# Altium PCB Manea_ThCAD_PROIECT_PCB1.PcbDoc (part 1 of 2)
Units mm, origin at the board's own origin, x right, y up, seen from the top; angles counter-clockwise.
Board outline 230 x 140.5 mm, 2 copper layers (Top Layer, Bottom Layer); 49 components, 35 nets, 143 pads, 52 vias.
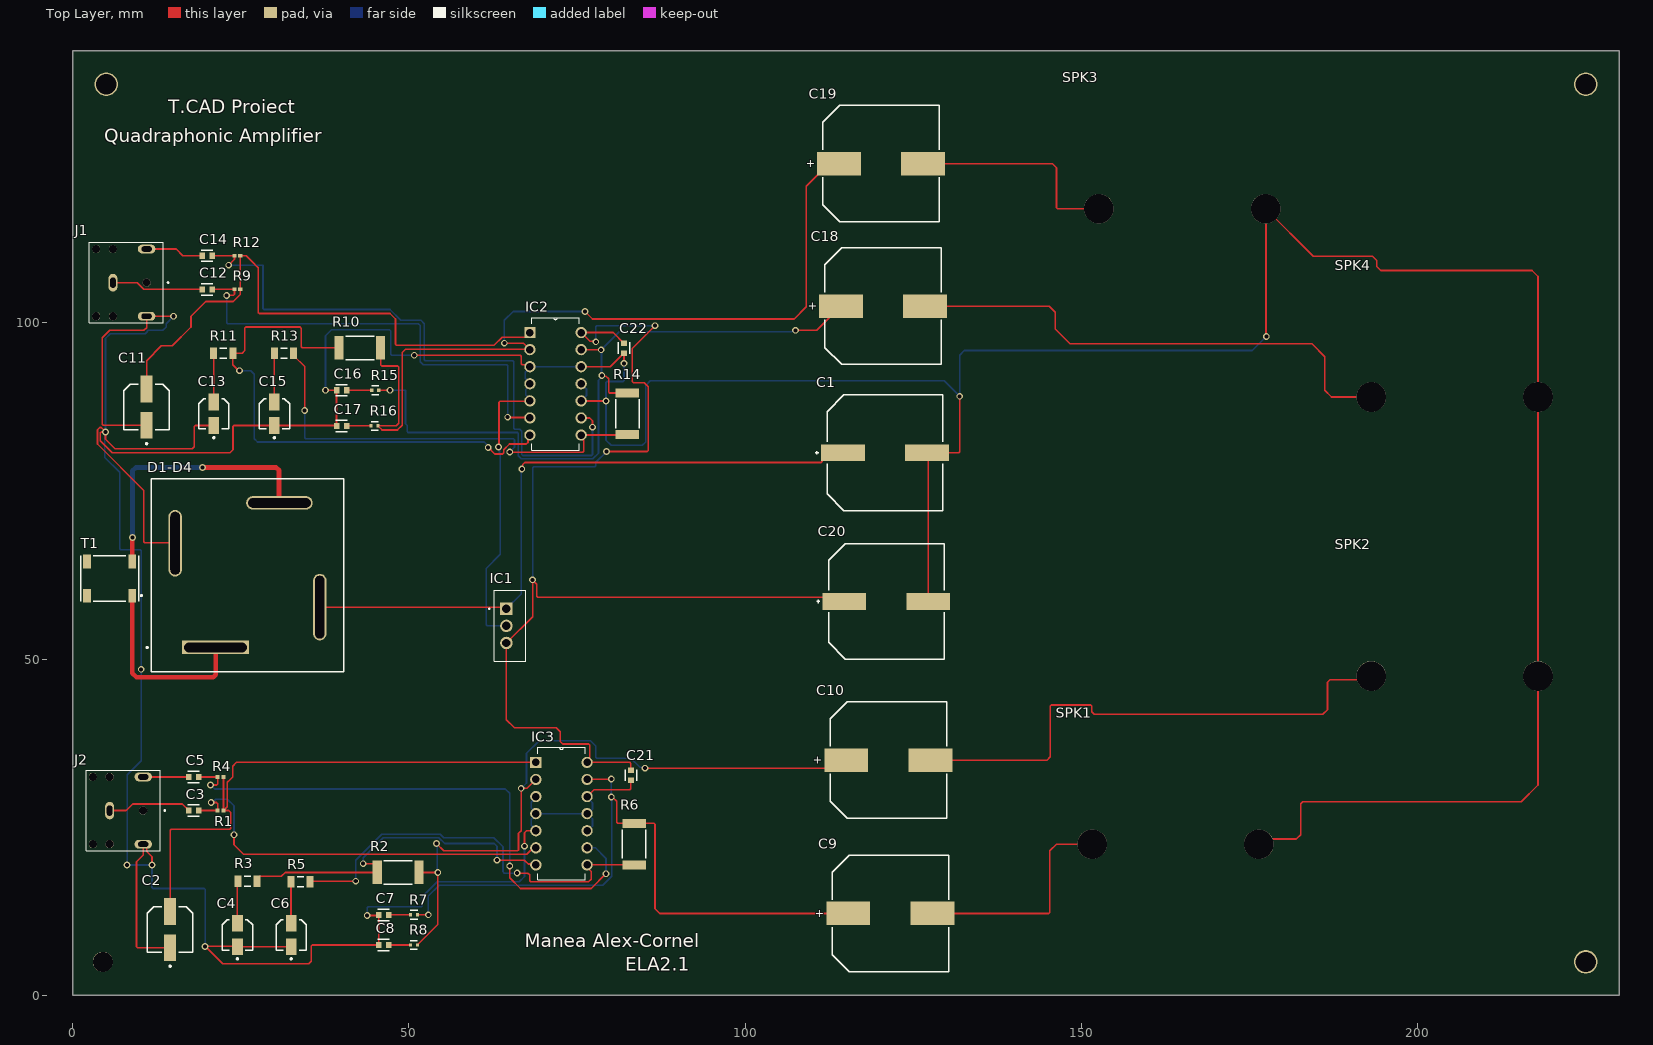
[diagram p0: Top Layer view]
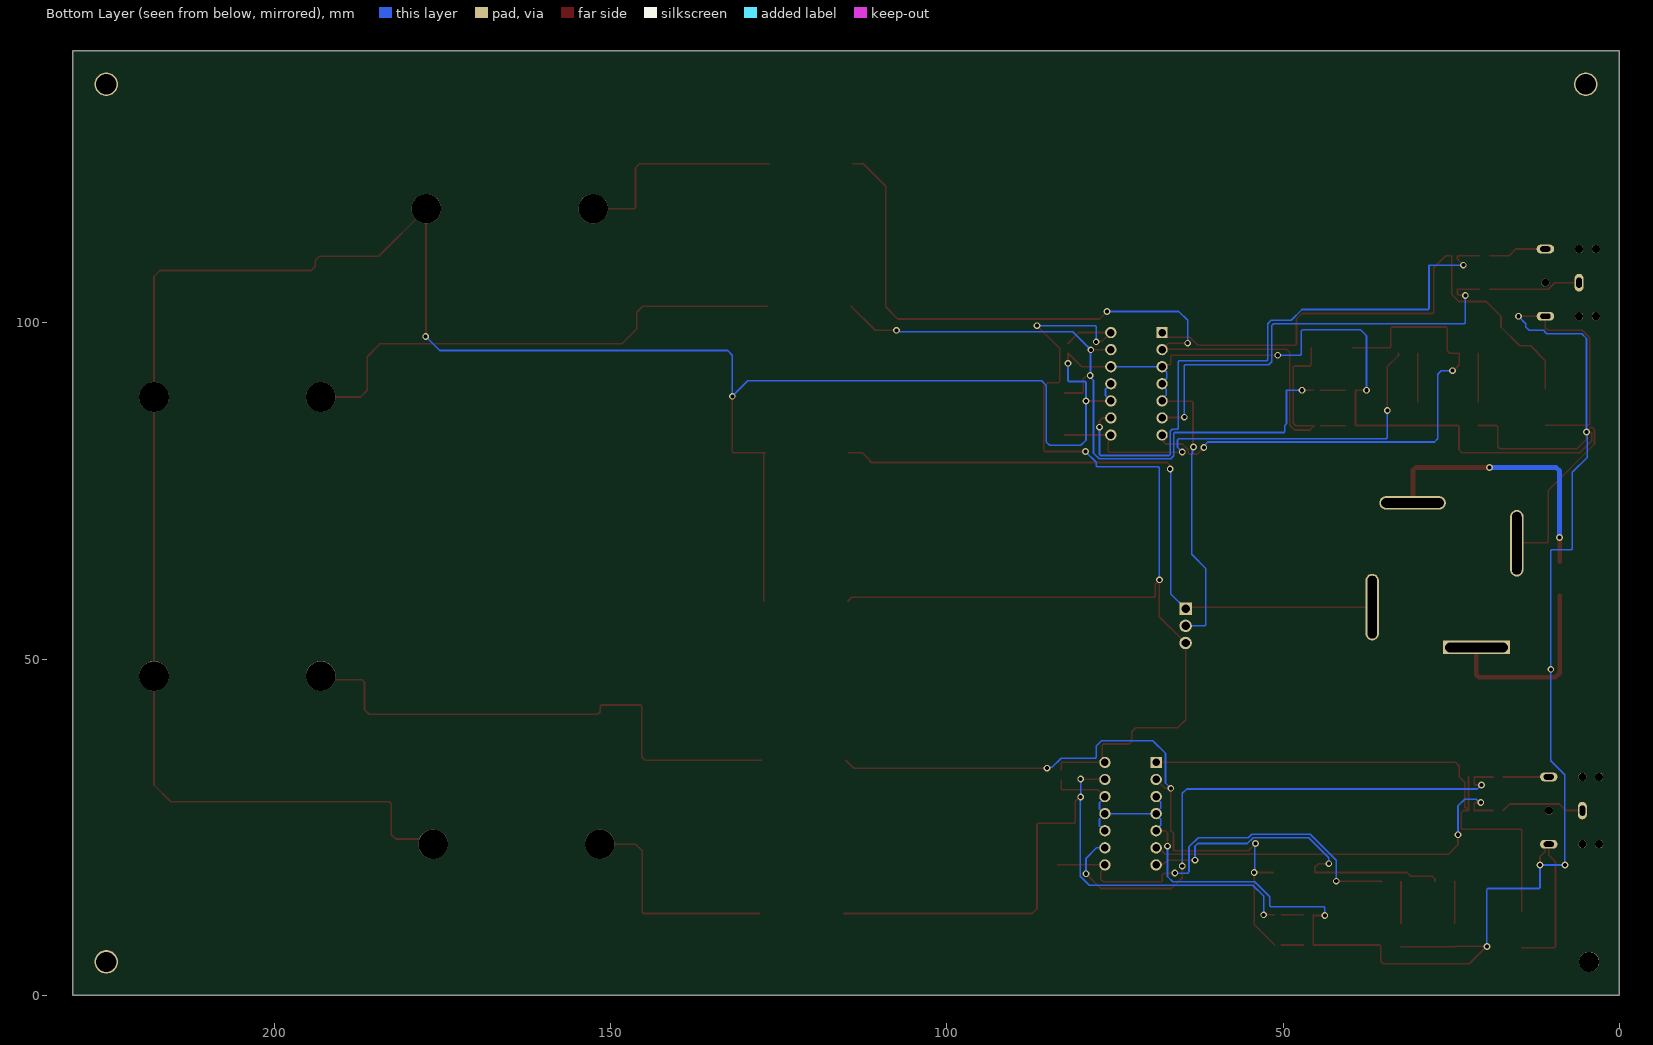
[diagram p1: Bottom Layer view, seen from below]
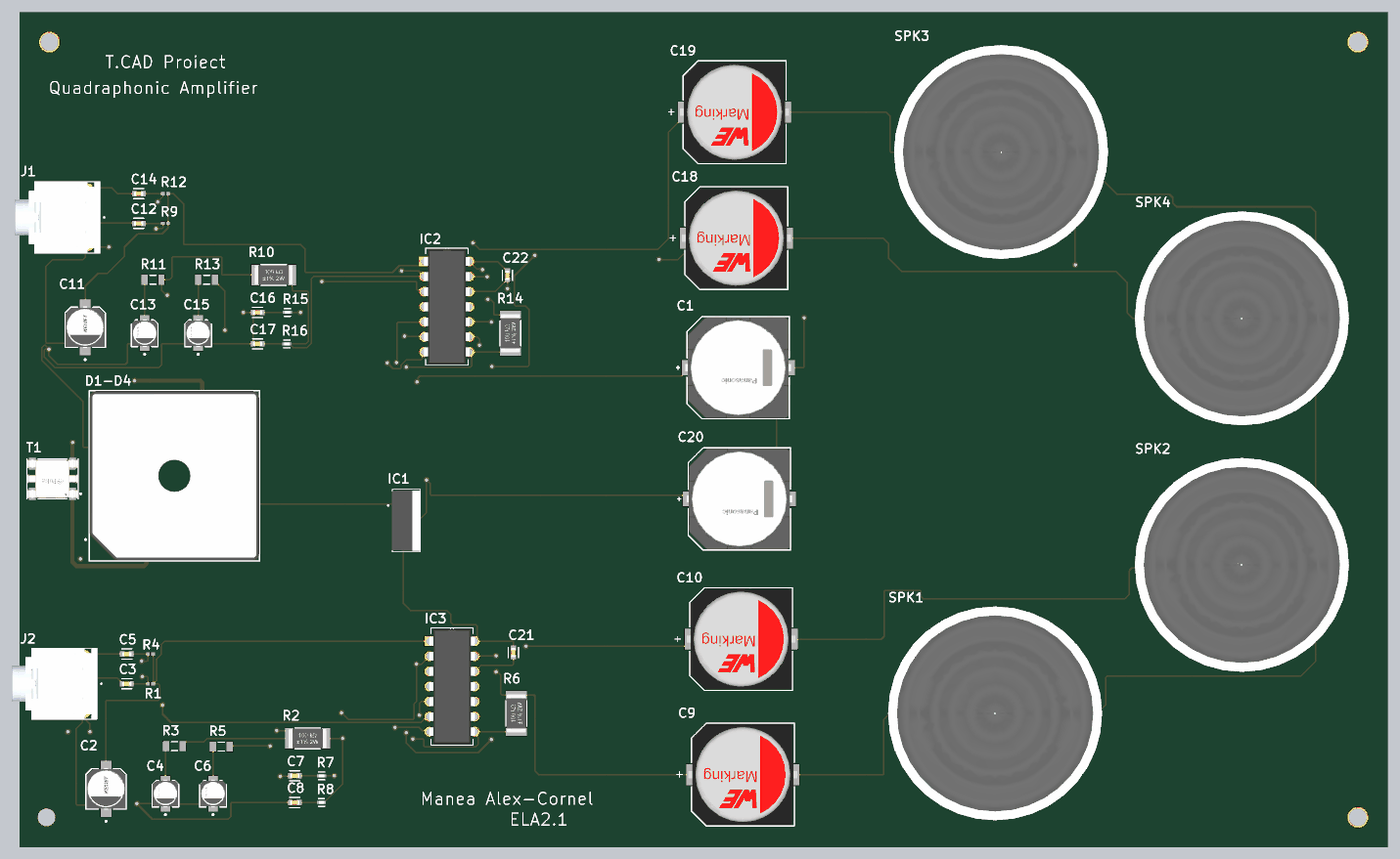
[diagram p2: 3D render of the assembled board from above, using the file's embedded part models]

## Layer stack, top to bottom
Top Solder: solder mask 0.0102, Solder Resist, Dk 3.5
Top Layer: signal copper 0.0356
Dielectric 1: dielectric 0.32, FR-4, Dk 4.8
Bottom Layer: signal copper 0.0356
Bottom Solder: solder mask 0.0102, Solder Resist, Dk 3.5

## Board outline
0,140.5 230,140.5 230,0 0,0

## Design rules (kind name [scope] priority, off if disabled: settings)
AssemblyTestPointUsage [All] p1: isadvanced=TRUE
AssemblyTestpoint [All] p1: isadvanced=TRUE testpointundercomponent=TRUE minsize=1.016 maxsize=2.54 preferedsize=1.524 minholesize=0 maxholesize=1.016 preferedholesize=0.813 testpointgrid=0.025 usegrid=TRUE gridtolerance=0 allowsidetop=TRUE allowsidebottom=TRUE
Clearance Clearance_1 [OnMid vs OnMid] p1: gap=0.25 ignorepadtopadclearanceinfootprint=FALSE sourcerule=41 cellrowname=All cellrowtype=0 cellcolname=All cellcoltype=0 innerlayers=TRUE
Clearance Clearance_2 [(ExistsOnLayer('Top Layer') Or ExistsOnLayer('Bottom Layer')) vs (ExistsOnLayer('Top Layer') Or ExistsOnLayer('Bottom Layer'))] p2: gap=0.25 ignorepadtopadclearanceinfootprint=FALSE sourcerule=41 cellrowname=All cellrowtype=0 cellcolname=All cellcoltype=0 outerlayers=TRUE
Clearance [All] p3: gap=0.254 ignorepadtopadclearanceinfootprint=FALSE ismatrix=TRUE
ComponentClearance [All] p1: isadvanced=TRUE gap=0.254 collisioncheckmode=3 verticalgap=0.254 showdistances=FALSE
FabricationTestPointUsage [All] p1: isadvanced=TRUE valid=0 allowmultiple=FALSE
FabricationTestpoint [All] p1: isadvanced=TRUE side=3 testpointundercomponent=TRUE minsize=1.016 maxsize=2.54 preferedsize=1.524 minholesize=0 maxholesize=1.016 preferedholesize=0.813 testpointgrid=0.025 allowsidetop=TRUE allowsidebottom=TRUE usegrid=TRUE gridtolerance=0
FanoutControl Fanout_BGA [IsBGA] p1: isadvanced=TRUE bgadir=Out bgaviamode=Centered fanoutstyle=Auto fanoutdirection=Alternating viagrid=0.025 // Fanout_BGA (Default Rule)
FanoutControl Fanout_LCC [IsLCC] p2: isadvanced=TRUE bgadir=Out bgaviamode=Centered fanoutstyle=Auto fanoutdirection=Alternating viagrid=0.025 // Fanout_LCC (Default Rule)
FanoutControl Fanout_SOIC [IsSOIC] p3: isadvanced=TRUE bgadir=Out bgaviamode=Centered fanoutstyle=Auto fanoutdirection=Alternating viagrid=0.025 // Fanout_SOIC (Default Rule)
FanoutControl Fanout_Small [(CompPinCount < 5)] p4: isadvanced=TRUE bgadir=Out bgaviamode=Centered fanoutstyle=Auto fanoutdirection=OutThenIn viagrid=0.025 // Fanout_Small (Default Rule)
FanoutControl Fanout_Default [All] p5: isadvanced=TRUE bgadir=Out bgaviamode=Centered fanoutstyle=Auto fanoutdirection=Alternating viagrid=0.025 // Fanout_Default (Default Rule)
Height [All] p1: isadvanced=TRUE minheight=0 maxheight=25.4 prefheight=12.7
HoleSize [All] p1: isadvanced=TRUE absolutevalues=TRUE maxlimit=2.54 minlimit=0.025 maxpercent=80.000 minpercent=20.000
HoleToHoleClearance [All] p1: isadvanced=TRUE gap=0.254 allowstackedmicrovias=TRUE
LayerPairs [All] p1: isadvanced=TRUE enforce=TRUE
MinimumSolderMaskSliver [All] p1: isadvanced=TRUE minsoldermaskwidth=0.254
NetAntennae [All] p1: isadvanced=TRUE netantennaetolerance=0
PasteMaskExpansion [All] p1: isadvanced=TRUE expansion=0
PlaneClearance [All] p1: isadvanced=TRUE clearance=0.508
PlaneConnect [All] p1: isadvanced=TRUE planeconnectstyle=Relief reliefexpansion=0.508 reliefentries=4 reliefconductorwidth=0.254 reliefairgap=0.254
PolygonConnect [All] p1: connectstyle=Relief reliefconductorwidth=0.254 reliefentries=4 polygonreliefangle="90 Angle" airgapwidth=0.254
RoutingCorners [All] p1: isadvanced=TRUE cornerstyle=45-Degree minsetback=2.54 maxsetback=2.54
RoutingPriority [All] p1: isadvanced=TRUE routingpriority=0
RoutingVias [All] p1: holewidth=0.6 width=1 viastyle="Through Hole" minholewidth=0.6 minwidth=1 maxholewidth=0.6 maxwidth=1
ShortCircuit [All] p1: isadvanced=TRUE allowed=FALSE
SilkToSilkClearance [All] p1: isadvanced=TRUE silktosilkclearance=0.254
SilkToSolderMaskClearance [IsPad] p1: isadvanced=TRUE minsilkscreentomaskgap=0.254 clearancetoexposedcopper=TRUE
SolderMaskExpansion [All] p1: isadvanced=TRUE expansion=0.102 istentingtop=FALSE
SupplyNets "Schematic Supply Nets" [InNet('GND')] p1: isadvanced=TRUE voltage=0.000
UnRoutedNet [All] p1: isadvanced=TRUE
UnpouredPolygon [All] p1: isadvanced=TRUE
Width MaxMinWidth_3 [InNet('12V 1A 1')] p1: maxlimit=1.5 minlimit=0.7 preferedwidth=0.8 minimp=50.000000 maximp=50.000000 favimp=50.000000
Width MaxMinWidth_4 [InNet('12V 1A 2')] p2: maxlimit=1.5 minlimit=0.7 preferedwidth=0.8 minimp=50.000000 maximp=50.000000 favimp=50.000000
Width MaxMinWidth_1 [InNetClass('NewClass')] p3: maxlimit=0.5 minlimit=0.2 preferedwidth=0.5 minimp=50.000000 maximp=50.000000 favimp=50.000000
Width MaxMinWidth_2 [InxNetClass('All xNets')] p4: maxlimit=0.25 minlimit=0.2 preferedwidth=0.25 minimp=50.000000 maximp=50.000000 favimp=50.000000
Width [All] p5: maxlimit=0.254 minlimit=0.254 preferedwidth=0.254
4 further rules are at their usual default settings.

## Components (designator, comment, footprint, x,y, rotation, side; value= is the part's Value field where it differs from the comment)
C1 "EEV-FK1H102M" FP-FK-J16-MFG 120.8,80.7 r180 top value=1mF
C2 "EDH476M050S9HAA" FP-EDH476M050S9HAA-IPC_A 14.5,9.8 r90 top value=47µF
C3 "Cap 100nF" FP-CC0603-DA-MFG 18,27.5 r0 top value=100nF
C4 "EEEFP1C100AR" FP-FPB-MFG 24.5,9 r90 top value=10µF
C5 "Cap 100nF" FP-CC0603-DA-MFG 18,32.5 r0 top value=100nF
C6 "EEEFP1C100AR" FP-FPB-MFG 32.5,9 r90 top value=10µF
C7 "Cap 100nF" FP-CC0603-DA-MFG 46.25,12 r180 top value=100nF
C8 "Cap 100nF" FP-CC0603-DA-MFG 46.25,7.5 r180 top value=100nF
C9 "865080463017" WCAP-ASLI_D16H17 121.6,12.2 r180 top value=2.2mF
C10 "865080463017" WCAP-ASLI_D16H17 121.3,35 r180 top value=2.2mF
C11 "EDH476M050S9HAA" FP-EDH476M050S9HAA-IPC_A 11,87.5 r90 top value=47µF
C12 "Cap 100nF" FP-CC0603-DA-MFG 20,105 r0 top value=100nF
C13 "EEEFP1C100AR" FP-FPB-MFG 21,86.5 r90 top value=10µF
C14 "Cap 100nF" FP-CC0603-DA-MFG 20,110 r0 top value=100nF
C15 "EEEFP1C100AR" FP-FPB-MFG 30,86.5 r90 top value=10µF
C16 "Cap 100nF" FP-CC0603-DA-MFG 40,90 r180 top value=100nF
C17 "Cap 100nF" FP-CC0603-DA-MFG 40,84.7 r180 top value=100nF
C18 "865080463017" WCAP-ASLI_D16H17 120.5,102.5 r180 top value=2.2mF
C19 "865080463017" WCAP-ASLI_D16H17 120.2,123.7 r180 top value=2.2mF
C20 "EEV-FK1H102M" FP-FK-J16-MFG 121,58.6 r180 top value=1mF
C21 "Cap 100nF" FP-CC0603-DA-MFG 83,32.75 r90 top value=100nF
C22 "Cap 100nF" FP-CC0603-DA-MFG 82,96.25 r90 top value=100nF
D1-D4 "VS-36MB160A" FP-95326-MFG 26,62.5 r180 top
IC1 "LM7812" TO254P1054X470X1955-3 64.5,54.96 r270 top
IC2 "LM1877N" DIP254P762X533-14 75.62,83.34 r0 top
IC3 "LM1877N" DIP254P762X533-14 76.5,19.42 r0 top
J1 "SJ1-3523N" CUI_SJ1-3523N 6,106 r270 top
J2 "SJ1-3523N" CUI_SJ1-3523N 5.5,27.5 r270 top
R1 "RC0402FR-071ML" RESC1005X40X25NL05T10 22,27.5 r0 top value=1MΩ
R2 "CRGP2512F100K" FP-CRGP2512-IPC_A 48.4,18.3 r0 top value=100kΩ
R3 "RC1206FR-071KL" RESC3116X65X40NL10T20 26,17 r0 top value=1kΩ
R4 "RC0402FR-071ML" RESC1005X40X25NL05T10 22,32.5 r0 top value=1MΩ
R5 "RC1206FR-071KL" RESC3116X65X40NL10T20 33.9,16.9 r0 top value=1kΩ
R6 "CRGP2512F100K" FP-CRGP2512-IPC_A 83.5,22.5 r90 top value=100kΩ
R7 "CR0402-J/-2R7GLF" FP-CR0402-MFG 50.762,12 r180 top value=2.7Ω
R8 "CR0402-J/-2R7GLF" FP-CR0402-MFG 50.75,7.5 r180 top value=2.7Ω
R9 "RC0402FR-071ML" RESC1005X40X25NL05T10 24.5,105 r0 top value=1MΩ
R10 "CRGP2512F100K" FP-CRGP2512-IPC_A 42.7,96.3 r0 top value=100kΩ
R11 "RC1206FR-071KL" RESC3116X65X40NL10T20 22.4,95.5 r0 top value=1kΩ
R12 "RC0402FR-071ML" RESC1005X40X25NL05T10 24.5,110 r0 top value=1MΩ
R13 "RC1206FR-071KL" RESC3116X65X40NL10T20 31.425,95.5 r0 top value=1kΩ
R14 "CRGP2512F100K" FP-CRGP2512-IPC_A 82.5,86.5 r90 top value=100kΩ
R15 "CR0402-J/-2R7GLF" FP-CR0402-MFG 45,90 r180 top value=2.7Ω
R16 "CR0402-J/-2R7GLF" FP-CR0402-MFG 44.9,84.7 r180 top value=2.7Ω
SPK1 "ASE02808MR-LW150-R" MANEA_SPEAKER 164,22.5 r0 top
SPK2 "ASE02808MR-LW150-R" MANEA_SPEAKER 205.5,47.5 r0 top
SPK3 "ASE02808MR-LW150-R" MANEA_SPEAKER 165,117 r0 top
SPK4 "ASE02808MR-LW150-R" MANEA_SPEAKER 205.5,89 r0 top
T1 "PE-68386NL" FP-PE-68386NL-MFG 5.5,62 r180 top value=785µH

## Footprints (in the part's own frame and the unit in brackets; to place one, negate y for a bottom-side part, rotate by r counter-clockwise, add the part's x,y. Pads: shape width x height; smd on the part's side, far side on the other; paste and mask are expansions set on the pad)
CUI_SJ1-3523N [mm] "Manea - Stereo jack"
  oval 2.616x1.308 hole 0.8 slot 1.5 at 0 deg: 1(0,0)
  oval 1.308x2.616 hole 0.8 slot 1.5 at 90 deg: 2(5,5) 3(-5,5)
  round 1.2 hole 1.2 unplated: ""(-5,0) ""(-5,-2.5) ""(0,5) ""(5,-2.5) ""(5,0)
  silkscreen extent -6,-3.5 6,8.3, body extent -6,-6.81 6,7.49, height 3.01
DIP254P762X533-14 [mil] "Manea - IC LM1877N"
  rect 66x66 / inner round 66 / far side rect 66x66 hole 44: 1(-300,600)
  round 66 hole 44: 2(-300,500) 3(-300,400) 4(-300,300) 5(-300,200) 6(-300,100) 7(-300,0) 8(0,0) 9(0,100) 10(0,200) 11(0,300) 12(0,400) 13(0,500) 14(0,600)
  silkscreen extent -290,-88 -10,688, body extent -305,-80 5,680, height 200
FP-95326-MFG [mm] "Manea - Bridge Diode"
  rect 9.9x2 hole 1.4 slot 9.3 at 0 deg paste-2539.97 mask+0: 1(4.75,10.75)
  rrect100% 2x9.9 hole 1.4 slot 9.3 at 90 deg paste-2539.97 mask+0: 2(-10.75,4.75) 3(10.75,-4.75)
  rrect100% 9.9x2 hole 1.4 slot 9.3 at 0 deg paste-2539.97 mask+0: 4(-4.75,-10.75)
  silkscreen extent -14.33,-14.33 15.05,14.33, body extent -14.42,-14.43 14.43,14.43, height 0.25
FP-CC0603-DA-MFG [mm] "Manea - Cap 100nF Ceramic"
  rect 0.8x0.9 smd paste+0 mask+0.102: 1(-0.75,0) 2(0.75,0)
  silkscreen extent -0.85,-0.85 0.85,0.85, body extent -1.35,-0.75 1.35,0.75, height 0.25
FP-CR0402-MFG [mm] "Manea Resis - 2.7Ω (mid - short)"
  rect 0.475x0.5 smd paste+0 mask+0: 1(-0.513,0) 2(0.512,0)
  silkscreen extent -0.53,-0.65 0.52,0.65, body extent -0.85,-0.38 0.85,0.38, height 0.25
FP-CRGP2512-IPC_A [mm] "Manea Resis - 100kΩ (long)"
  rect 1.35x3.5 smd paste+0 mask+0.102: 1(-3.102,0) 2(3.102,0)
  silkscreen extent -2.12,-1.75 2.12,1.75, body extent -4.28,-2.25 4.28,2.25, height 0.25
FP-EDH476M050S9HAA-IPC_A [mm] "Manea Cap - 47μF (small)"
  rect 4x1.8 smd paste+0 mask+0.102: 1(-2.7,0) 2(2.7,0)
  silkscreen extent -5.57,-3.4 3.4,3.4, body extent -5.7,-4.4 5.7,4.4, height 0.25
FP-FK-J16-MFG [mm] "Manea Cap - 1mF"
  rect 6.5x2.5 smd paste+0 mask+0.102: 1(-6.25,0) 2(6.25,0)
  silkscreen extent -8.6,-8.6 10.38,8.6, body extent -9.75,-8.85 9.75,8.85, height 0.25
FP-FPB-MFG [mm] "Manea Cap - 10μF"
  rect 2.5x1.6 smd paste+0 mask+0.102: 1(-1.75,0) 2(1.75,0)
  silkscreen extent -3.67,-2.25 2.25,2.25, body extent -3.25,-2.5 3.25,2.5, height 0.25
FP-PE-68386NL-MFG [mil] "Manea Transformator"
  rect 45x80 smd paste+0 mask+0: 1(-132.5,100) 3(-132.5,-100) 4(132.5,-100) 6(132.5,100)
  silkscreen extent -192,-133 170,133, body extent -174,-144 174,144, height 10
MANEA_SPEAKER [mm] "36 mm, Round Frame, 2.0 W, 8 Ohm, Neodymium Magnet, Paper Cone, Speaker [CLS0361 - Same Sky]"
  round 4.4 hole 4.4 unplated paste-2539.97 mask+0: 1(12.4,0) 2(-12.4,0)
  body extent -18,-18 18,18, height 6
RESC1005X40X25NL05T10 [mm] "Manea - Resistor 1MΩ (mid) Chip Resistor, 2-Leads, Body 1.00x0.50mm, IPC Medium Density"
  rect 0.6x0.55 smd: 1(-0.425,0) 2(0.425,0)
  body extent -0.53,-0.27 0.53,0.28, height 0.4
RESC3116X65X40NL10T20 [mm] "Manea - Resistor 1kΩ (mid) Chip Resistor, 2-Leads, Body 3.10x1.60mm, IPC Medium Density"
  rect 1.05x1.7 smd: 1(-1.425,0) 2(1.425,0)
  silkscreen extent -0.5,-0.75 0.5,0.75, body extent -1.6,-0.85 1.6,0.85, height 0.65
TO254P1054X470X1955-3 [mm] "Manea - Integrated Circuit (LM7812) [ IC1 ]"
  rect 1.86x1.86 / inner round 1.86 / far side rect 1.86x1.86 hole 1.24: 1(-2.54,0)
  round 1.86 hole 1.24: 2(0,0) 3(2.54,0)
  silkscreen extent -5.27,-2.64 5.27,2.86, body extent -5.08,-1.91 5.08,2.79, height 15.49
WCAP-ASLI_D16H17 [mm] "Manea Cap - 2.2mF Aluminium Electrolytic V-Chip SMT Capacitors, 16x17mm"
  rect 6.5x3.5 smd: 1(6.25,0) 2(-6.25,0)
  silkscreen extent -8.65,-8.65 8.65,8.65, body extent -9.15,-8.5 9.15,8.5, height 17

## Part data
C1 C20: "Radial Can - SMD ALUMINUM ELECTROLYTIC CAPACITOR FK 50V 1000muF 卤20% 0.630Dia 16.00mm", Case/Package=Radial, Dielectric Material=Aluminium, ESR (Equivalent Series Resistance)=73mΩ, Leakage Current=500µA, Manufacturer=Panasonic, Manufacturer Lifecycle Status=ACTIVE, Max Operating Temperature=105°C, Min Operating Temperature=-55°C, Ripple Current=1.61A, Supplier Part Number=PCE3477CT-ND, Tolerance=20%, Voltage=50V, Category="Aluminum Electrolytic Capacitors", ComponentLink1Description=https://datasheet.octopart.com:443/EEV-FK1H102M-Panasonic-datasheet-138897395.pdf?src-supplier=Upverter, ComponentLink1URL=https://datasheet.octopart.com:443/EEV-FK1H102M-Panasonic-datasheet-138897395.pdf?src-supplier=Upverter, ComponentLink2Description=https://datasheet.octopart.com:443/EEV-FK1H102M-Panasonic-datasheet-62287436.pdf?src-supplier=Panasonic, ComponentLink2URL=https://datasheet.octopart.com:443/EEV-FK1H102M-Panasonic-datasheet-62287436.pdf?src-supplier=Panasonic, ComponentLink3Description=https://datasheet.octopart.com:443/EEV-FK1H102M-Panasonic-datasheet-13266987.pdf?src-supplier=Newark, ComponentLink3URL=https://datasheet.octopart.com:443/EEV-FK1H102M-Panasonic-datasheet-13266987.pdf?src-supplier=Newark, ComponentLink4Description=https://datasheet.octopart.com:443/EEV-FK1H102M-Panasonic-datasheet-61627622.pdf?src-supplier=Newark, ComponentLink4URL=https://datasheet.octopart.com:443/EEV-FK1H102M-Panasonic-datasheet-61627622.pdf?src-supplier=Newark, ComponentLink5Description=https://datasheet.octopart.com:443/EEV-FK1H102M-Panasonic-datasheet-8854493.pdf?src-supplier=Farnell, ComponentLink5URL=https://datasheet.octopart.com:443/EEV-FK1H102M-Panasonic-datasheet-8854493.pdf?src-supplier=Farnell, ComponentLink6Description=https://datasheet.octopart.com:443/EEV-FK1H102M-Panasonic-datasheet-8711795.pdf?src-supplier=Farnell, ComponentLink6URL=https://datasheet.octopart.com:443/EEV-FK1H102M-Panasonic-datasheet-8711795.pdf?src-supplier=Farnell, ComponentLink7Description=https://datasheet.octopart.com:443/EEV-FK1H102M-Panasonic-datasheet-5313801.pdf?src-supplier=Farnell, ComponentLink7URL=https://datasheet.octopart.com:443/EEV-FK1H102M-Panasonic-datasheet-5313801.pdf?src-supplier=Farnell, ComponentLink8Description=https://datasheet.octopart.com:443/EEVFK1H102M-Panasonic-datasheet-7555708.pdf?src-supplier=Farnell, ComponentLink8URL=https://datasheet.octopart.com:443/EEVFK1H102M-Panasonic-datasheet-7555708.pdf?src-supplier=Farnell, ComponentLink9Description=https://datasheet.octopart.com:443/EEVFK1H102M-Panasonic-datasheet-5318435.pdf?src-supplier=Farnell, ComponentLink9URL=https://datasheet.octopart.com:443/EEVFK1H102M-Panasonic-datasheet-5318435.pdf?src-supplier=Farnell, ComponentLink10Description=https://datasheet.octopart.com:443/EEVFK1H102M-Panasonic-datasheet-5316599.pdf?src-supplier=Farnell, ComponentLink10URL=https://datasheet.octopart.com:443/EEVFK1H102M-Panasonic-datasheet-5316599.pdf?src-supplier=Farnell, ComponentLink11Description=https://datasheet.octopart.com:443/EEVFK1H102M-Panasonic-datasheet-5390910.pdf?src-supplier=Farnell, ComponentLink11URL=https://datasheet.octopart.com:443/EEVFK1H102M-Panasonic-datasheet-5390910.pdf?src-supplier=Farnell, ComponentLink12Description=https://datasheet.octopart.com:443/EEVFK1H102M-Panasonic-datasheet-7550061.pdf?src-supplier=Farnell, ComponentLink12URL=https://datasheet.octopart.com:443/EEVFK1H102M-Panasonic-datasheet-7550061.pdf?src-supplier=Farnell, ComponentLink13Description=https://datasheet.octopart.com:443/EEVFK1H102M-Panasonic-datasheet-1770.pdf?src-supplier=Farnell, ComponentLink13URL=https://datasheet.octopart.com:443/EEVFK1H102M-Panasonic-datasheet-1770.pdf?src-supplier=Farnell, ComponentLink14Description=https://datasheet.octopart.com:443/EEVFK1H102M-Panasonic-datasheet-1290.pdf?src-supplier=Farnell, ComponentLink14URL=https://datasheet.octopart.com:443/EEVFK1H102M-Panasonic-datasheet-1290.pdf?src-supplier=Farnell, ComponentLink15Description=https://datasheet.octopart.com:443/EEVFK1H102M-Panasonic-datasheet-2601.pdf?src-supplier=Farnell, ComponentLink15URL=https://datasheet.octopart.com:443/EEVFK1H102M-Panasonic-datasheet-2601.pdf?src-supplier=Farnell, ComponentLink16Description=https://datasheet.octopart.com:443/EEVFK1H102M-Panasonic-datasheet-122249.pdf?src-supplier=Farnell, ComponentLink16URL=https://datasheet.octopart.com:443/EEVFK1H102M-Panasonic-datasheet-122249.pdf?src-supplier=Farnell, ComponentLink17Description=https://datasheet.octopart.com:443/EEVFK1H102M-Panasonic-datasheet-4056.pdf?src-supplier=Farnell, ComponentLink17URL=https://datasheet.octopart.com:443/EEVFK1H102M-Panasonic-datasheet-4056.pdf?src-supplier=Farnell, ComponentLink18Description=https://datasheet.octopart.com:443/EEV-FK1H102M-Panasonic-datasheet-8161.pdf?src-supplier=element14, ComponentLink18URL=https://datasheet.octopart.com:443/EEV-FK1H102M-Panasonic-datasheet-8161.pdf?src-supplier=element14, ComponentLink19Description=https://datasheet.octopart.com:443/EEV-FK1H102M-Panasonic-datasheet-150469824.pdf?src-supplier=Master+Electronics, ComponentLink19URL=https://datasheet.octopart.com:443/EEV-FK1H102M-Panasonic-datasheet-150469824.pdf?src-supplier=Master+Electronics, ComponentLink20Description=https://sigma.octopart.com:443/150570760/technical_drawing/Panasonic-EEVFK1H102M.pdf?src-supplier=Panasonic+SCT, ComponentLink20URL=https://sigma.octopart.com:443/150570760/technical_drawing/Panasonic-EEVFK1H102M.pdf?src-supplier=Panasonic+SCT, ComponentLink21Description=https://datasheet.octopart.com:443/EEVFK1H102M-Panasonic-datasheet-136531309.pdf?src-supplier=TME, ComponentLink21URL=https://datasheet.octopart.com:443/EEVFK1H102M-Panasonic-datasheet-136531309.pdf?src-supplier=TME, ComponentLink22Description=https://datasheet.octopart.com:443/EEVFK1H102M-Panasonic-datasheet-11546739.pdf?src-supplier=TME, ComponentLink22URL=https://datasheet.octopart.com:443/EEVFK1H102M-Panasonic-datasheet-11546739.pdf?src-supplier=TME, ComponentLink23Description=https://datasheet.octopart.com:443/EEVFK1H102M-Panasonic-datasheet-5315649.pdf?src-supplier=Verical, ComponentLink23URL=https://datasheet.octopart.com:443/EEVFK1H102M-Panasonic-datasheet-5315649.pdf?src-supplier=Verical, ComponentLink24Description=https://datasheet.octopart.com:443/EEVFK1H102M-Panasonic-datasheet-13275731.pdf?src-supplier=Verical, ComponentLink24URL=https://datasheet.octopart.com:443/EEVFK1H102M-Panasonic-datasheet-13275731.pdf?src-supplier=Verical, ComponentLink25Description=https://datasheet.octopart.com:443/EEV-FK1H102M-Panasonic-datasheet-48.pdf?src-supplier=DigiKey, ComponentLink25URL=https://datasheet.octopart.com:443/EEV-FK1H102M-Panasonic-datasheet-48.pdf?src-supplier=DigiKey, ComponentLink26Description=https://datasheet.octopart.com:443/EEV-FK1H102M-Panasonic-datasheet-122143.pdf?src-supplier=Electro+Sonic, ComponentLink26URL=https://datasheet.octopart.com:443/EEV-FK1H102M-Panasonic-datasheet-122143.pdf?src-supplier=Electro+Sonic, Contact Plating=Tin, Country of Origin="Japan, Malaysia", Diameter=16mm, Dissipation Factor=10%, Export Control Classification Number (ECCN) Code=EAR99, Height=16.5mm, Height - Seated (Max)=16.51mm, Impedance=73mΩ, Introduction Date=2001-12-07, Lead Free="Lead Free", Length=16.5mm, Life (Hours)=2000hours, Lifecycle Status=Production, Manufacturer Part Number=EEV-FK1H102M, Material=Aluminium, Mounting Technology="Surface Mount", Number of Terminals=2, Packaging="Cut Tape", Part Series=FK, Pins=2, Pricing="1=2.17, 10=1.427, 50=1.1178 (USD)", Radiation Hardening=No, REACH SVHC=Yes, Ripple Current (AC)=1.61A, RoHS=Compliant, Schedule B=8532220020, Stock=6943, Supplier=DigiKey, Termination=SMD/SMT, Voltage Rating=50V, Voltage Rating (AC)=50V, Voltage Rating (DC)=50V, Width=17mm
C2 C11: "Radial Can - SMD ALUMINUM ELECTROLYTIC CAPACITOR EDH 50V 47muF ±20% 0.248Dia 6.30mm", Leakage Current=23.5µA, Manufacturer="Yageo Group", Max Operating Temperature=105°C, Min Operating Temperature=-40°C, Ripple Current=110mA, Supplier Part Number=399-EDH476M050S9HAACT-ND, Tolerance=20%, Voltage Rating=50V, Category="Aluminum Electrolytic Capacitors", ComponentLink1Description=https://datasheet.octopart.com:443/EDH476M050S9HAA-KEMET-datasheet-182055805.pdf?src-supplier=IHS, ComponentLink1URL=https://datasheet.octopart.com:443/EDH476M050S9HAA-KEMET-datasheet-182055805.pdf?src-supplier=IHS, ComponentLink2Description=https://datasheet.octopart.com:443/EDH476M050S9HAA-KEMET-datasheet-164311313.pdf?src-supplier=Upverter, ComponentLink2URL=https://datasheet.octopart.com:443/EDH476M050S9HAA-KEMET-datasheet-164311313.pdf?src-supplier=Upverter, ComponentLink3Description=https://datasheet.octopart.com:443/EDH476M050S9HAA-KEMET-datasheet-182000736.pdf?src-supplier=Farnell, ComponentLink3URL=https://datasheet.octopart.com:443/EDH476M050S9HAA-KEMET-datasheet-182000736.pdf?src-supplier=Farnell, ComponentLink4Description=https://datasheet.octopart.com:443/EDH476M050S9HAA-KEMET-datasheet-182000735.pdf?src-supplier=Farnell, ComponentLink4URL=https://datasheet.octopart.com:443/EDH476M050S9HAA-KEMET-datasheet-182000735.pdf?src-supplier=Farnell, ComponentLink5Description=https://datasheet.octopart.com:443/EDH476M050S9HAA-KEMET-datasheet-176335142.pdf?src-supplier=Newark, ComponentLink5URL=https://datasheet.octopart.com:443/EDH476M050S9HAA-KEMET-datasheet-176335142.pdf?src-supplier=Newark, ComponentLink6Description=https://datasheet.octopart.com:443/EDH476M050S9HAA-KEMET-datasheet-188904359.pdf?src-supplier=TME, ComponentLink6URL=https://datasheet.octopart.com:443/EDH476M050S9HAA-KEMET-datasheet-188904359.pdf?src-supplier=TME, Diameter=6.3mm, Dissipation Factor=12%, Export Control Classification Number (ECCN) Code=EAR99, Harmonized Tariff Schedule (HTS) Code=8532.22.00.20, Height=7.7mm, Introduction Date=2016-12-02, Length=6.6mm, Life (Hours)=2000hours, Lifecycle Status=Production, Manufacturer Part Number=EDH476M050S9HAA, Mounting Technology="Surface Mount", Number of Terminals=2, Pricing="1=0.48, 10=0.298, 50=0.2202, 100=0.1954, 500=0.1527 (USD)", REACH SVHC=Yes, RoHS=Compliant, Stock=14614, Supplier=DigiKey, Voltage Rating (DC)=50V, Width=6.6mm
C3 C5 C7 C8 C12 C14 C16 C17 C21 C22: library part CC0603KRX7R9BB104, "Multilayer Ceramic Capacitor, CC Series, 0.1 - F, - 10%, X7R, 50 V, 0603 [1608 Metric]", Case Code (Imperial)=0603, Case Code (Metric)=1608, Dielectric=X7R, Dielectric Material=Ceramic, Manufacturer="Yageo Group", Max Operating Temperature=125°C, Min Operating Temperature=-55°C, Tolerance=10%, Voltage=50V, Case/Package=0603, Category="Ceramic Capacitors", China RoHS=Compliant, ComponentLink1Description=https://datasheet.octopart.com:443/CC0603KRX7R9BB104-Yageo-datasheet-177165144.pdf?src-supplier=IHS, ComponentLink1URL=https://datasheet.octopart.com:443/CC0603KRX7R9BB104-Yageo-datasheet-177165144.pdf?src-supplier=IHS, ComponentLink2Description=https://datasheet.octopart.com:443/CC0603KRX7R9BB104-Yageo-datasheet-82288757.pdf?src-supplier=Upverter, ComponentLink2URL=https://datasheet.octopart.com:443/CC0603KRX7R9BB104-Yageo-datasheet-82288757.pdf?src-supplier=Upverter, ComponentLink3Description=https://datasheet.octopart.com:443/CC0603KRX7R9BB104-Yageo-datasheet-68298032.pdf?src-supplier=Upverter, ComponentLink3URL=https://datasheet.octopart.com:443/CC0603KRX7R9BB104-Yageo-datasheet-68298032.pdf?src-supplier=Upverter, ComponentLink4Description=https://datasheet.octopart.com:443/CC0603KRX7R9BB104-Yageo-Group-datasheet-189192896.pdf?src-supplier=Future+Electronics, ComponentLink4URL=https://datasheet.octopart.com:443/CC0603KRX7R9BB104-Yageo-Group-datasheet-189192896.pdf?src-supplier=Future+Electronics, ComponentLink5Description=https://datasheet.octopart.com:443/CC0603KRX7R9BB104-Yageo-datasheet-12526321.pdf?src-supplier=Future+Electronics, ComponentLink5URL=https://datasheet.octopart.com:443/CC0603KRX7R9BB104-Yageo-datasheet-12526321.pdf?src-supplier=Future+Electronics, ComponentLink6Description=https://datasheet.octopart.com:443/CC0603KRX7R9BB104-Yageo-datasheet-166511530.pdf?src-supplier=Future+Electronics, ComponentLink6URL=https://datasheet.octopart.com:443/CC0603KRX7R9BB104-Yageo-datasheet-166511530.pdf?src-supplier=Future+Electronics, ComponentLink7Description=https://datasheet.octopart.com:443/CC0603KRX7R9BB104-Yageo-datasheet-137700082.pdf?src-supplier=Future+Electronics, ComponentLink7URL=https://datasheet.octopart.com:443/CC0603KRX7R9BB104-Yageo-datasheet-137700082.pdf?src-supplier=Future+Electronics, ComponentLink8Description=https://datasheet.octopart.com:443/CC0603KRX7R9BB104-Yageo-datasheet-137700084.pdf?src-supplier=Future+Electronics, ComponentLink8URL=https://datasheet.octopart.com:443/CC0603KRX7R9BB104-Yageo-datasheet-137700084.pdf?src-supplier=Future+Electronics, ComponentLink9Description=https://datasheet.octopart.com:443/CC0603KRX7R9BB104-Yageo-datasheet-27626582.pdf?src-supplier=Future+Electronics, ComponentLink9URL=https://datasheet.octopart.com:443/CC0603KRX7R9BB104-Yageo-datasheet-27626582.pdf?src-supplier=Future+Electronics, ComponentLink10Description=https://datasheet.octopart.com:443/CC0603KRX7R9BB104-Yageo-datasheet-15895757.pdf?src-supplier=Future+Electronics, ComponentLink10URL=https://datasheet.octopart.com:443/CC0603KRX7R9BB104-Yageo-datasheet-15895757.pdf?src-supplier=Future+Electronics, ComponentLink11Description=https://datasheet.octopart.com:443/CC0603KRX7R9BB104-Yageo-datasheet-8324192.pdf?src-supplier=Future+Electronics, ComponentLink11URL=https://datasheet.octopart.com:443/CC0603KRX7R9BB104-Yageo-datasheet-8324192.pdf?src-supplier=Future+Electronics, ComponentLink12Description=https://datasheet.octopart.com/CC0603KRX7R9BB104-Yageo-datasheet-10883670.pdf, ComponentLink12URL=https://datasheet.octopart.com/CC0603KRX7R9BB104-Yageo-datasheet-10883670.pdf, ComponentLink13Description=https://datasheet.octopart.com:443/CC0603KRX7R9BB104-Yageo-datasheet-181968726.pdf?src-supplier=Newark, ComponentLink13URL=https://datasheet.octopart.com:443/CC0603KRX7R9BB104-Yageo-datasheet-181968726.pdf?src-supplier=Newark, ComponentLink14Description=https://datasheet.octopart.com:443/CC0603KRX7R9BB104-Yageo-datasheet-499490.pdf?src-supplier=Newark, ComponentLink14URL=https://datasheet.octopart.com:443/CC0603KRX7R9BB104-Yageo-datasheet-499490.pdf?src-supplier=Newark, ComponentLink15Description=https://datasheet.octopart.com:443/CC0603KRX7R9BB104-Yageo-datasheet-62336348.pdf?src-supplier=Newark, ComponentLink15URL=https://datasheet.octopart.com:443/CC0603KRX7R9BB104-Yageo-datasheet-62336348.pdf?src-supplier=Newark, ComponentLink16Description=https://datasheet.octopart.com:443/CC0603KRX7R9BB104-Yageo-datasheet-147453679.pdf?src-supplier=Newark, ComponentLink16URL=https://datasheet.octopart.com:443/CC0603KRX7R9BB104-Yageo-datasheet-147453679.pdf?src-supplier=Newark, ComponentLink17Description=https://datasheet.octopart.com:443/CC0603KRX7R9BB104-Yageo-datasheet-151948686.pdf?src-supplier=Farnell, ComponentLink17URL=https://datasheet.octopart.com:443/CC0603KRX7R9BB104-Yageo-datasheet-151948686.pdf?src-supplier=Farnell, ComponentLink18Description=https://datasheet.octopart.com:443/CC0603KRX7R9BB104-Yageo-datasheet-500777.pdf?src-supplier=Farnell, ComponentLink18URL=https://datasheet.octopart.com:443/CC0603KRX7R9BB104-Yageo-datasheet-500777.pdf?src-supplier=Farnell, ComponentLink19Description=https://datasheet.octopart.com:443/CC0603KRX7R9BB104-Yageo-datasheet-178019014.pdf?src-supplier=Burklin+Elektronik, ComponentLink19URL=https://datasheet.octopart.com:443/CC0603KRX7R9BB104-Yageo-datasheet-178019014.pdf?src-supplier=Burklin+Elektronik, ComponentLink20Description=https://datasheet.octopart.com:443/CC0603KRX7R9BB104-Yageo-Group-datasheet-165992755.pdf?src-supplier=ODG+(Origin+Data+Global), ComponentLink20URL=https://datasheet.octopart.com:443/CC0603KRX7R9BB104-Yageo-Group-datasheet-165992755.pdf?src-supplier=ODG+(Origin+Data+Global), ComponentLink21Description=https://datasheet.octopart.com:443/CC0603KRX7R9BB104-Yageo-datasheet-140260305.pdf?src-supplier=SOS+electronic, ComponentLink21URL=https://datasheet.octopart.com:443/CC0603KRX7R9BB104-Yageo-datasheet-140260305.pdf?src-supplier=SOS+electronic, ComponentLink22Description=https://datasheet.octopart.com:443/CC0603KRX7R9BB104-Yageo-datasheet-120101875.pdf?src-supplier=Megastar, ComponentLink22URL=https://datasheet.octopart.com:443/CC0603KRX7R9BB104-Yageo-datasheet-120101875.pdf?src-supplier=Megastar, ComponentLink23Description=https://datasheet.octopart.com:443/CC0603KRX7R9BB104-Yageo-datasheet-8701427.pdf?src-supplier=element14, ComponentLink23URL=https://datasheet.octopart.com:443/CC0603KRX7R9BB104-Yageo-datasheet-8701427.pdf?src-supplier=element14, ComponentLink24Description=https://datasheet.octopart.com:443/CC0603KRX7R9BB104-Yageo-datasheet-5301394.pdf?src-supplier=element14, ComponentLink24URL=https://datasheet.octopart.com:443/CC0603KRX7R9BB104-Yageo-datasheet-5301394.pdf?src-supplier=element14, ComponentLink25Description=https://datasheet.octopart.com:443/CC0603KRX7R9BB104-Yageo-datasheet-17600895.pdf?src-supplier=TME, ComponentLink25URL=https://datasheet.octopart.com:443/CC0603KRX7R9BB104-Yageo-datasheet-17600895.pdf?src-supplier=TME, ComponentLink26Description=http://sigma.octopart.com:80/15889575/rohs_statement/Yageo-CC0603KRX7R9BB104.pdf?src-supplier=Compliance+Statements, ComponentLink26URL=http://sigma.octopart.com:80/15889575/rohs_statement/Yageo-CC0603KRX7R9BB104.pdf?src-supplier=Compliance+Statements, ComponentLink27Description=http://sigma.octopart.com:80/conflict_mineral_statement/Yageo-company-3.pdf?src-supplier=Compliance+Statements, ComponentLink27URL=http://sigma.octopart.com:80/conflict_mineral_statement/Yageo-company-3.pdf?src-supplier=Compliance+Statements, Country of Origin="Mainland China, Taiwan", Depth=800µm, Export Control Classification Number (ECCN) Code=EAR99, Halogen Free="Halogen Free", Harmonized Tariff Schedule (HTS) Code=8532.24.00.20, Height=800µm, Introduction Date=2005-08-18, Lead Free="Lead Free", Length=1.6mm, Lifecycle Status=Production, Manufacturer Part Number=CC0603KRX7R9BB104, Material=Ceramic, Mounting Technology="Surface Mount", Number of Terminals=2, Pins=2, Pricing="10=10, 100=0.06, 500=0.06, 1000=0.05, 2000=0.05, 4000=0.04 (EUR)", Radiation Hardening=No, REACH SVHC=Yes, RoHS=Compliant, Schedule B="8532240020, 8532240020|8532240020, 8532240020|8532240020|8532240020, 8532240020|8532240020|8532240020|8532240020", Stock=1047442, Supplier=Farnell, Supplier Part Number=CC0603KRX7R9BB104, Termination=SMD/SMT, Thickness=889µm, Voltage Rating=50V, Voltage Rating (DC)=50V, Width=800µm
C4 C6 C13 C15: "Capacitor Aluminum 10uF 16VDC 20% 4 X 5.8mm SMD 0.85 Ohm 160mA 2000 hr Embossed T/R", Case/Package=Radial, ESR (Equivalent Series Resistance)=850mΩ, Leakage Current=3µA, Manufacturer=Panasonic, Manufacturer Lifecycle Status=ACTIVE, Max Operating Temperature=105°C, Min Operating Temperature=-55°C, Ripple Current=160mA, Tolerance=20%, Voltage=16V, Category="Aluminum Electrolytic Capacitors", ComponentLink1Description=https://datasheet.octopart.com:443/EEEFP1C100AR-Panasonic-datasheet-182100943.pdf?src-supplier=IHS, ComponentLink1URL=https://datasheet.octopart.com:443/EEEFP1C100AR-Panasonic-datasheet-182100943.pdf?src-supplier=IHS, ComponentLink2Description=https://datasheet.octopart.com:443/EEEFP1C100AR-Panasonic-datasheet-66433925.pdf?src-supplier=Future+Electronics, ComponentLink2URL=https://datasheet.octopart.com:443/EEEFP1C100AR-Panasonic-datasheet-66433925.pdf?src-supplier=Future+Electronics, ComponentLink3Description=https://datasheet.octopart.com:443/EEEFP1C100AR-Panasonic-datasheet-5402830.pdf?src-supplier=Future+Electronics, ComponentLink3URL=https://datasheet.octopart.com:443/EEEFP1C100AR-Panasonic-datasheet-5402830.pdf?src-supplier=Future+Electronics, ComponentLink4Description=https://datasheet.octopart.com:443/EEEFP1C100AR-Panasonic-datasheet-10533123.pdf?src-supplier=Future+Electronics, ComponentLink4URL=https://datasheet.octopart.com:443/EEEFP1C100AR-Panasonic-datasheet-10533123.pdf?src-supplier=Future+Electronics, ComponentLink5Description=https://datasheet.octopart.com:443/EEEFP1C100AR-Panasonic-datasheet-8835375.pdf?src-supplier=Future+Electronics, ComponentLink5URL=https://datasheet.octopart.com:443/EEEFP1C100AR-Panasonic-datasheet-8835375.pdf?src-supplier=Future+Electronics, ComponentLink6Description=https://datasheet.octopart.com:443/EEEFP1C100AR-Panasonic-datasheet-13268972.pdf?src-supplier=Electro+Sonic, ComponentLink6URL=https://datasheet.octopart.com:443/EEEFP1C100AR-Panasonic-datasheet-13268972.pdf?src-supplier=Electro+Sonic, ComponentLink7Description=https://datasheet.octopart.com:443/EEEFP1C100AR-Panasonic-datasheet-43765692.pdf?src-supplier=Electro+Sonic, ComponentLink7URL=https://datasheet.octopart.com:443/EEEFP1C100AR-Panasonic-datasheet-43765692.pdf?src-supplier=Electro+Sonic, ComponentLink8Description=https://datasheet.octopart.com:443/EEE-FP1C100AR-Panasonic-datasheet-27908621.pdf?src-supplier=Electro+Sonic, ComponentLink8URL=https://datasheet.octopart.com:443/EEE-FP1C100AR-Panasonic-datasheet-27908621.pdf?src-supplier=Electro+Sonic, ComponentLink9Description=https://datasheet.octopart.com:443/EEE-FP1C100AR-Panasonic-datasheet-154766120.pdf?src-supplier=JRH+Electronics, ComponentLink9URL=https://datasheet.octopart.com:443/EEE-FP1C100AR-Panasonic-datasheet-154766120.pdf?src-supplier=JRH+Electronics, ComponentLink10Description=https://datasheet.octopart.com:443/EEEFP1C100AR-Panasonic-datasheet-178895083.pdf?src-supplier=Burklin+Elektronik, ComponentLink10URL=https://datasheet.octopart.com:443/EEEFP1C100AR-Panasonic-datasheet-178895083.pdf?src-supplier=Burklin+Elektronik, ComponentLink11Description=https://sigma.octopart.com:443/150570760/technical_drawing/Panasonic-EEEFP1C100AR.pdf?src-supplier=Panasonic+SCT, ComponentLink11URL=https://sigma.octopart.com:443/150570760/technical_drawing/Panasonic-EEEFP1C100AR.pdf?src-supplier=Panasonic+SCT, ComponentLink12Description=https://datasheet.octopart.com:443/EEEFP1C100AR-Panasonic-datasheet-5301681.pdf?src-supplier=Farnell, ComponentLink12URL=https://datasheet.octopart.com:443/EEEFP1C100AR-Panasonic-datasheet-5301681.pdf?src-supplier=Farnell, Contact Plating=Tin, Country of Origin="Japan, Malaysia", Diameter=4mm, Dissipation Factor=16%, Export Control Classification Number (ECCN) Code=EAR99, Features="High Temperature", Harmonized Tariff Schedule (HTS) Code=8532.22.00.20, Height=5.8mm, Height - Seated (Max)=5.7912mm, Introduction Date=2008-03-04, Lead Free="Lead Free", Lead Pitch=1mm, Length=5.8mm, Life (Hours)=2000hours, Lifecycle Status=Production, Manufacturer Part Number=EEEFP1C100AR, Material=Aluminium, Mounting Technology="Surface Mount", Number of Terminals=2, Packaging="Cut Tape", Part Series="FP (High temp. reflow)", Pins=2, Pricing="2000=2000 (EUR)", Radiation Hardening=No, REACH SVHC=Yes, Ripple Current (AC)=160mA, RoHS=Compliant, Schedule B="8532220020, 8532220020|8532220020, 8532220020|8532220020|8532220020, 8532220020|8532220020|8532220020|8532220020", Stock=40000, Supplier=Farnell, Supplier Part Number=EEEFP1C100AR, Termination=SMD/SMT, Voltage Rating=16V, Voltage Rating (DC)=16V, Width=4.3mm
C9 C10 C18 C19: "SMD Aluminium Electrolytic Capacitor, WCAP-ASLI Series, 2200 F, 25 V, Radial Can - SMD, 16 mm", Case/Package=Radial, ESR (Equivalent Series Resistance)=40.2412mΩ, Insulation Resistance=45.4545kΩ, Leakage Current=550µA, Manufacturer="Wurth Elektronik", Max Operating Temperature=105°C, Min Operating Temperature=-55°C, Ripple Current=1.25A, Supplier Part Number=732-8445-1-ND, Tolerance=20%, Voltage Rating=25V, Category="Aluminum Electrolytic Capacitors", ComponentLink1Description=https://datasheet.octopart.com:443/865080463017-Wurth-Elektronik-datasheet-168508426.pdf?src-supplier=Wurth+Elektronik, ComponentLink1URL=https://datasheet.octopart.com:443/865080463017-Wurth-Elektronik-datasheet-168508426.pdf?src-supplier=Wurth+Elektronik, ComponentLink2Description=https://datasheet.octopart.com:443/865080463017-W%C3%BCrth-Elektronik-datasheet-37144410.pdf?src-supplier=Newark, ComponentLink2URL=https://datasheet.octopart.com:443/865080463017-W%C3%BCrth-Elektronik-datasheet-37144410.pdf?src-supplier=Newark, Diameter=16mm, Height=17mm, Height - Seated (Max)=16.9926mm, Impedance=52mΩ, Length=17mm, Life (Hours)=2000hours, Manufacturer Part Number=865080463017, Mounting Technology="Surface Mount", Polarity=Polar, Pricing="1=3.83, 50=3.268 (USD)", REACH SVHC=Unknown, Ripple Current (AC)=1.25A, RoHS=Compliant, Stock=101, Supplier=DigiKey, Voltage Rating (DC)=25V, Width=17.1mm
D1-D4: "Diode, Bridge Rectifier, Vr 1600V, If 35A, Pkg D-34, Vf 1.3V, VS-36MB Series", Case/Package=D, Forward Current=35A, Forward Voltage=1.3V, Manufacturer=Vishay, Max Forward Surge Current (Ifsm)=500A, Max Operating Temperature=150°C, Max Repetitive Reverse Voltage (Vrrm)=1.6kV, Max Surge Current=155A, Min Operating Temperature=-55°C, Nominal Supply Voltage=1.13kV, Peak Reverse Current=10µA, Category="Bridge Rectifier Diodes", ComponentLink1Description=https://datasheet.octopart.com:443/VS-36MB160A-Vishay-datasheet-167934344.pdf?src-supplier=Newark, ComponentLink1URL=https://datasheet.octopart.com:443/VS-36MB160A-Vishay-datasheet-167934344.pdf?src-supplier=Newark, ComponentLink2Description=https://datasheet.octopart.com:443/VS-36MB160A-Vishay-datasheet-34179020.pdf?src-supplier=Newark, ComponentLink2URL=https://datasheet.octopart.com:443/VS-36MB160A-Vishay-datasheet-34179020.pdf?src-supplier=Newark, ComponentLink3Description=https://datasheet.octopart.com:443/VS-36MB160A-Vishay-datasheet-105827.pdf?src-supplier=Newark, ComponentLink3URL=https://datasheet.octopart.com:443/VS-36MB160A-Vishay-datasheet-105827.pdf?src-supplier=Newark, ComponentLink4Description=https://datasheet.octopart.com:443/VS-36MB160A-Vishay-datasheet-78835536.pdf?src-supplier=element14+APAC, ComponentLink4URL=https://datasheet.octopart.com:443/VS-36MB160A-Vishay-datasheet-78835536.pdf?src-supplier=element14+APAC, ComponentLink5Description=https://datasheet.octopart.com:443/VS-36MB160A-Vishay-datasheet-62319662.pdf?src-supplier=element14+APAC, ComponentLink5URL=https://datasheet.octopart.com:443/VS-36MB160A-Vishay-datasheet-62319662.pdf?src-supplier=element14+APAC, ComponentLink6Description=https://datasheet.octopart.com:443/VS-36MB160A-Vishay-datasheet-21423584.pdf?src-supplier=Farnell, ComponentLink6URL=https://datasheet.octopart.com:443/VS-36MB160A-Vishay-datasheet-21423584.pdf?src-supplier=Farnell, ComponentLink7Description=https://datasheet.octopart.com:443/VS-36MB160A-Vishay-datasheet-166790267.pdf?src-supplier=TME, ComponentLink7URL=https://datasheet.octopart.com:443/VS-36MB160A-Vishay-datasheet-166790267.pdf?src-supplier=TME, ComponentLink8Description=https://datasheet.octopart.com:443/VS-36MB160A-Vishay-datasheet-136158779.pdf?src-supplier=Future+Electronics, ComponentLink8URL=https://datasheet.octopart.com:443/VS-36MB160A-Vishay-datasheet-136158779.pdf?src-supplier=Future+Electronics, ComponentLink9Description=https://datasheet.octopart.com:443/VS-36MB160A-Vishay-datasheet-9661278.pdf?src-supplier=RS+(Formerly+Allied+Electronics), ComponentLink9URL=https://datasheet.octopart.com:443/VS-36MB160A-Vishay-datasheet-9661278.pdf?src-supplier=RS+(Formerly+Allied+Electronics), ComponentLink10Description=http://sigma.octopart.com:80/rohs_statement/Vishay-company-15.pdf?src-supplier=Compliance+Statements, ComponentLink10URL=http://sigma.octopart.com:80/rohs_statement/Vishay-company-15.pdf?src-supplier=Compliance+Statements, Contact Plating=Nickel, Element Configuration=Single, Export Control Classification Number (ECCN) Code=EAR99, Harmonized Tariff Schedule (HTS) Code=8541.10.00.80, Height=9.8mm, Introduction Date=2013-10-29, Length=28.5mm, Lifecycle Status=Production, Manufacturer Part Number=VS-36MB160A, Max Output current=35A, Mounting Technology="Screw, Through Hole", Number of Elements=4, Number of Terminals=4, Peak Non-Repetitive Surge Current=500A, Pins=4, Pricing="1=1, 5=55.37, 10=40.64, 50=39.37, 100=38.05, 250=37.29 (EUR)", Radiation Hardening=No, REACH SVHC=No, Reverse Standoff Voltage=1.6kV, RoHS=Compliant, Stock=238, Supplier=Farnell, Supplier Part Number=VS-36MB160A, Weight=19.999993g
IC1: "1.5-A, 30-V, linear voltage regulator 3-DDPAK/TO-263 0 to 125"
IC2 IC3: "LM1877 Buck Tape & Reel (TR) e3 DC to DC switching controller 400muA 6A 800mum 4.5V"